# Altium PCB decoder.PcbDoc
Units mil, origin at the board's own origin, x right, y up, seen from the top; angles counter-clockwise.
Board outline 2362.2 x 2362.2 mil, 2 copper layers (Top Layer, Bottom Layer); 62 components, 42 nets, 192 pads, 35 vias.
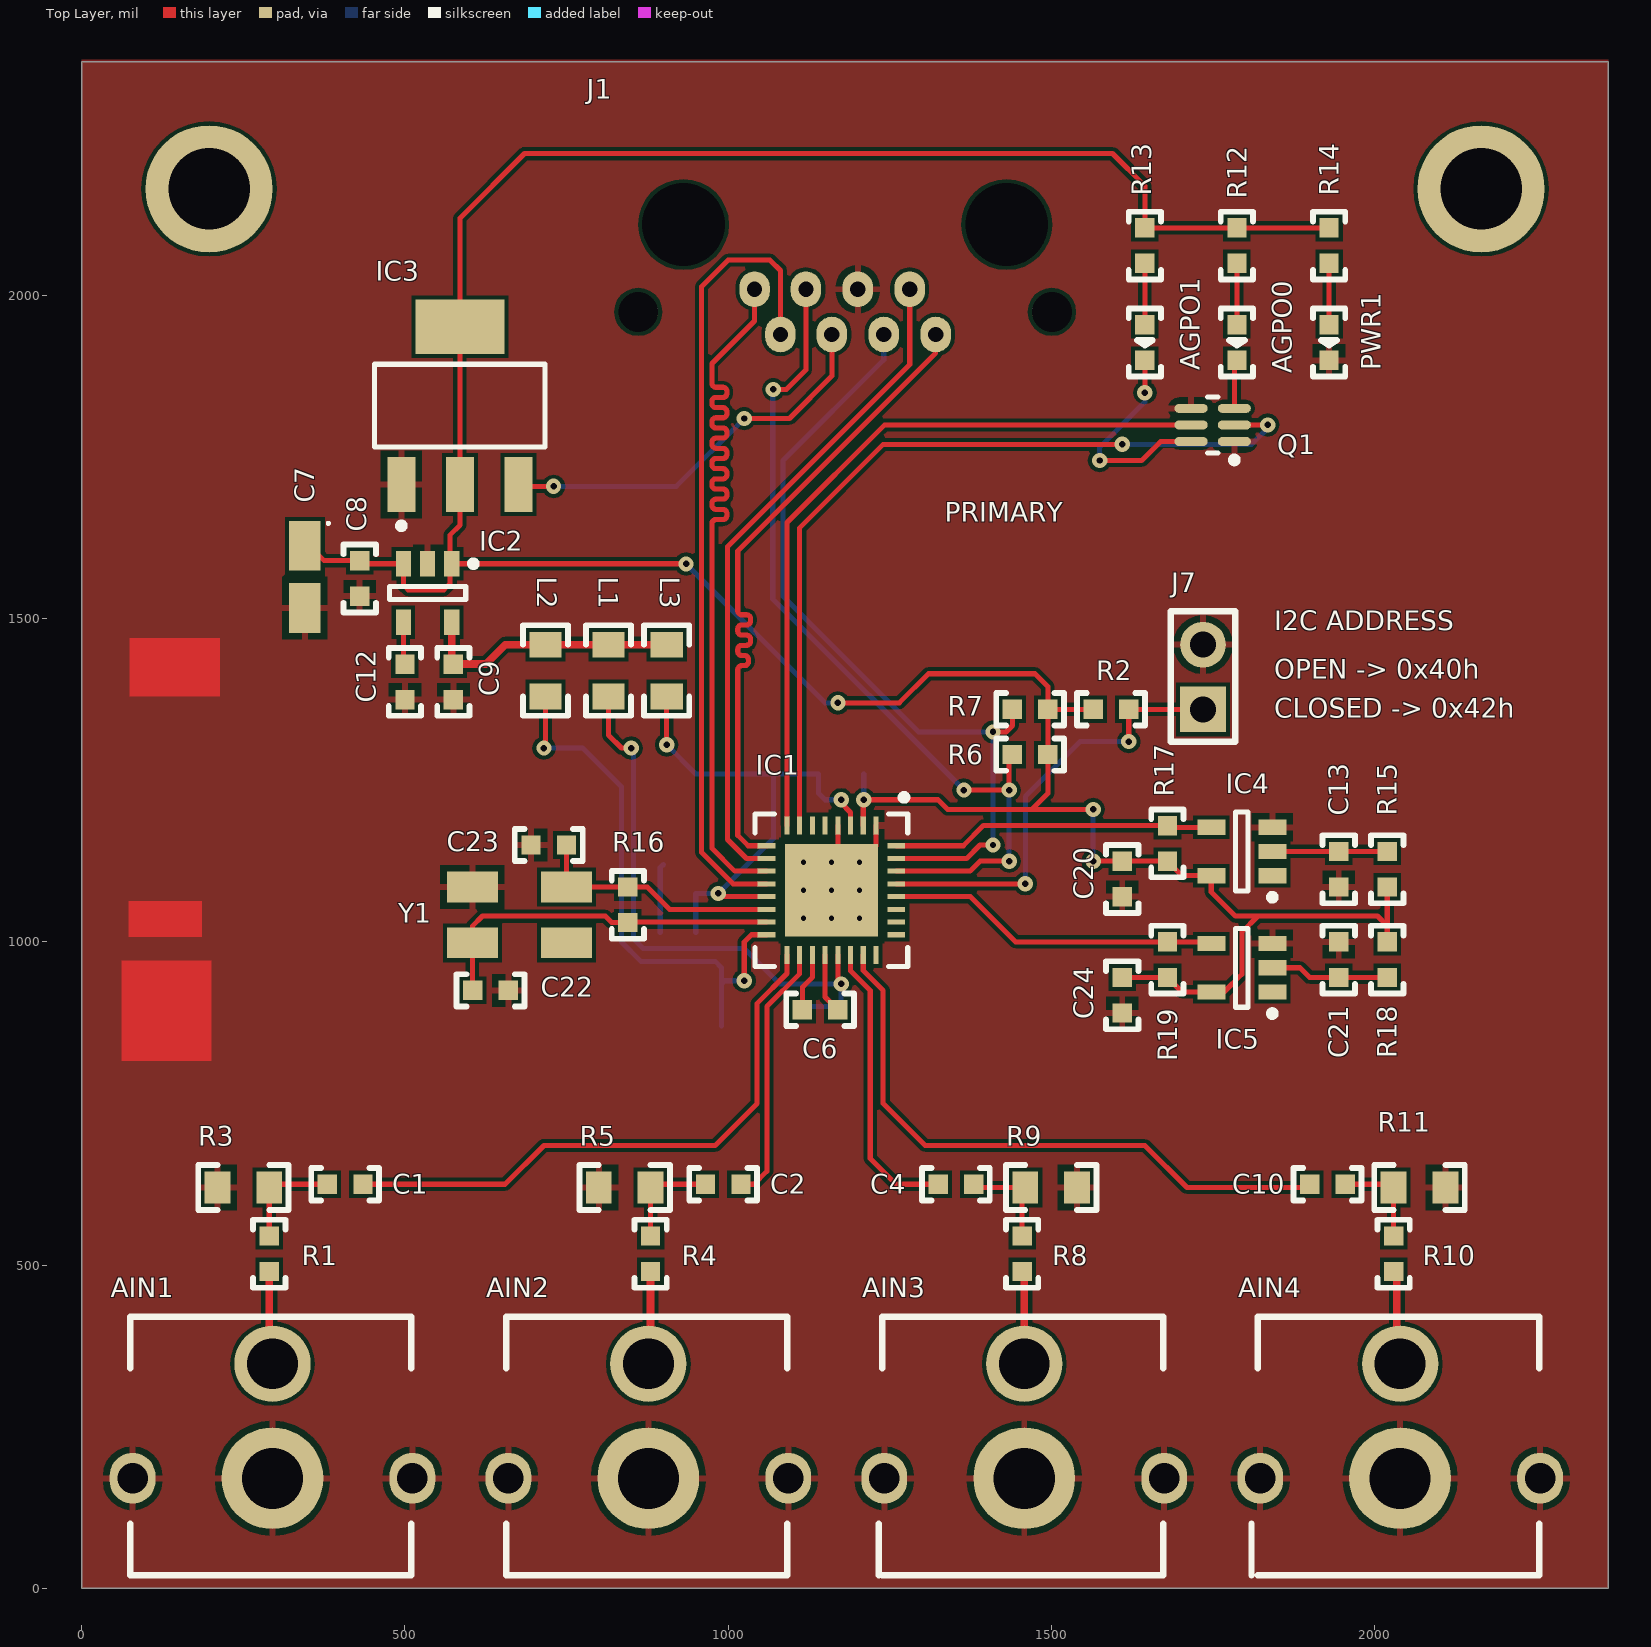
[diagram p0: Top Layer view]
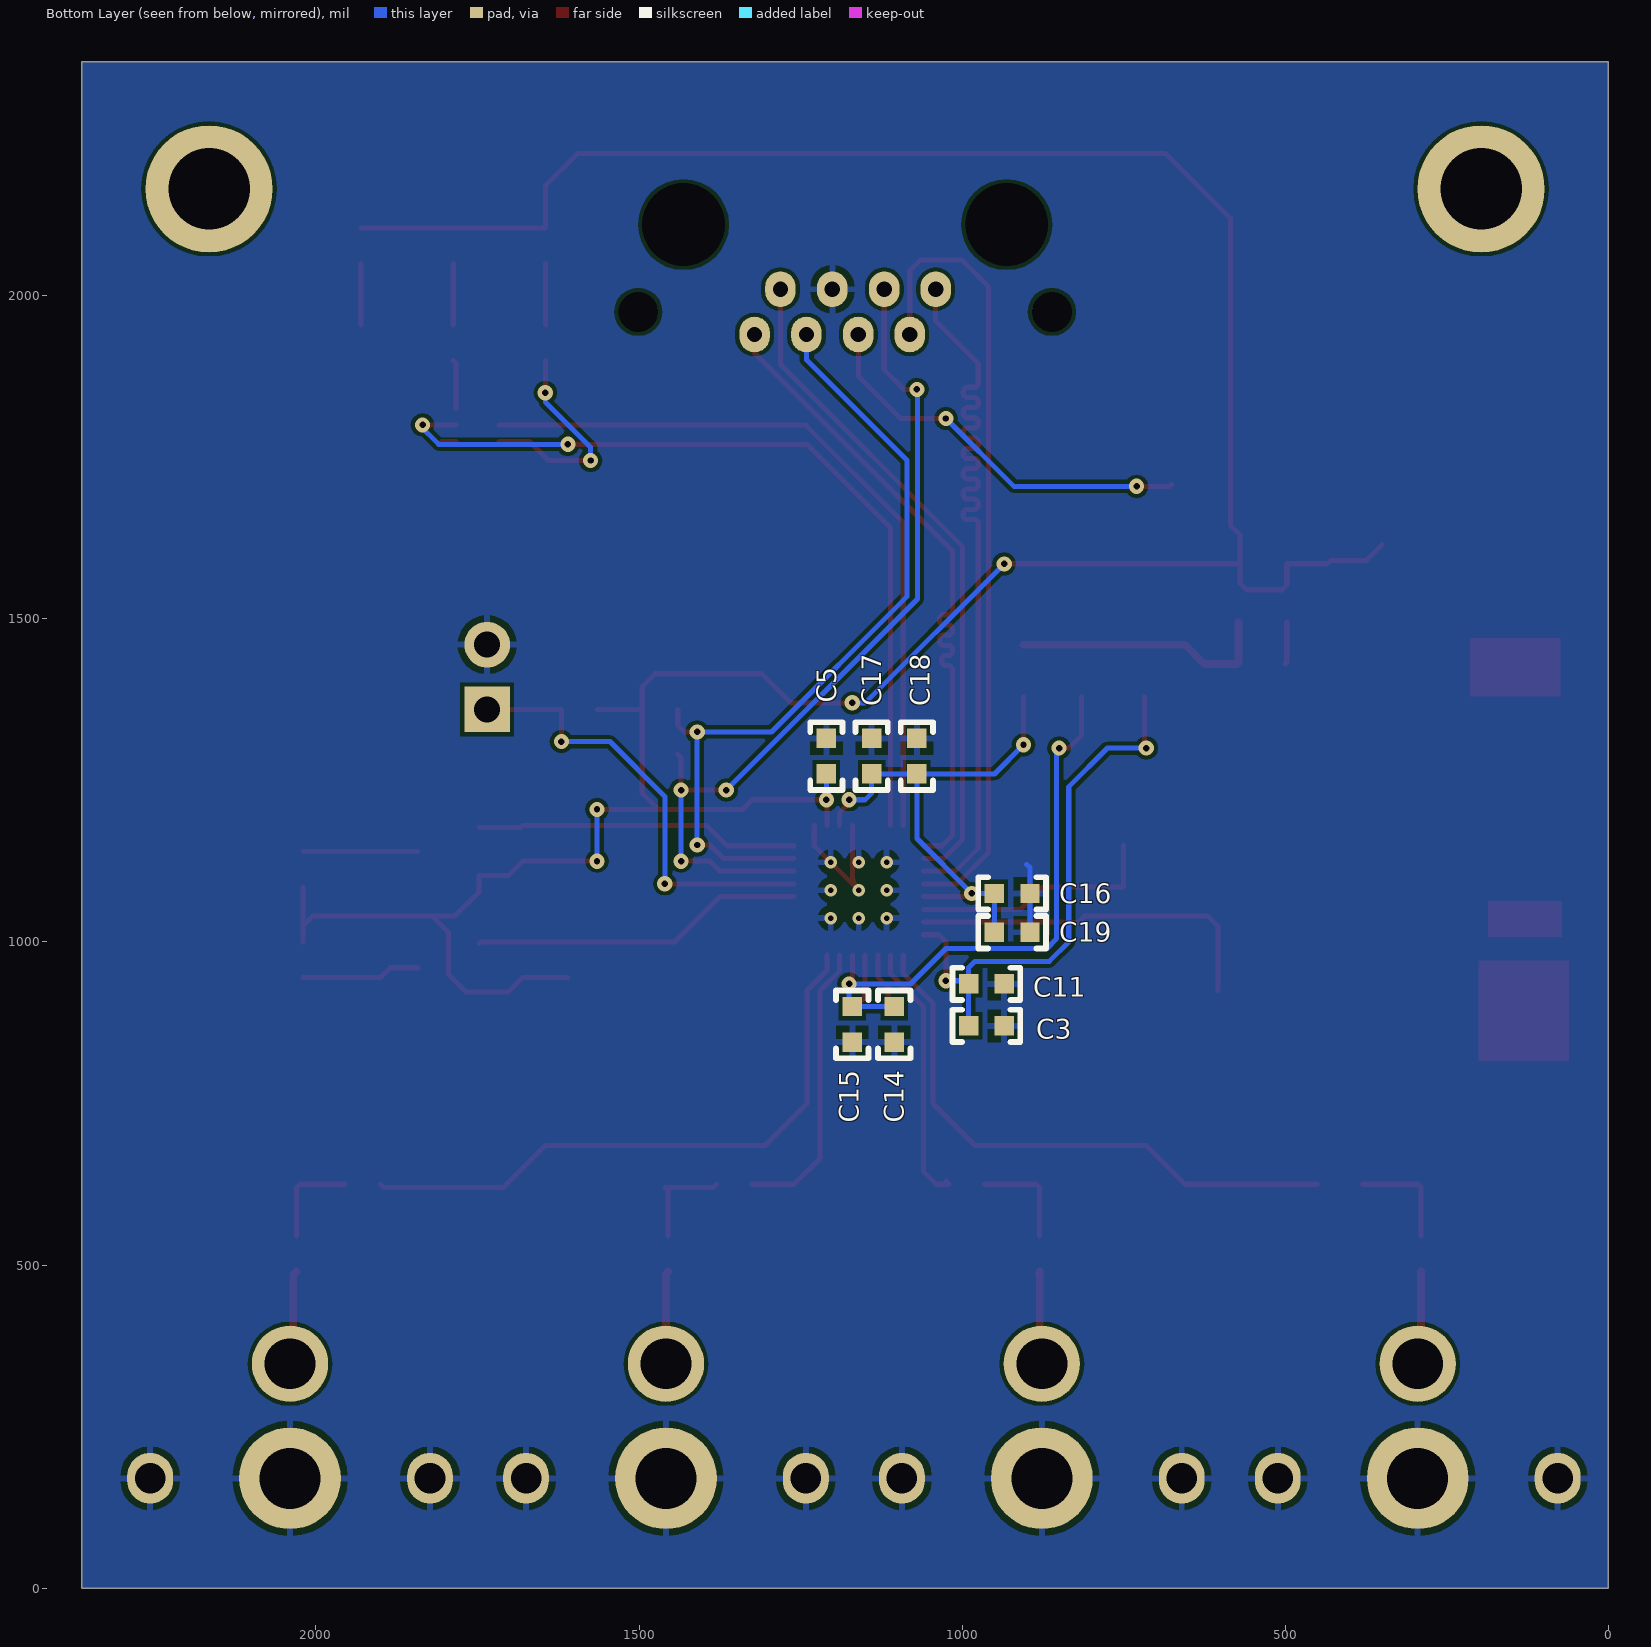
[diagram p1: Bottom Layer view, seen from below]
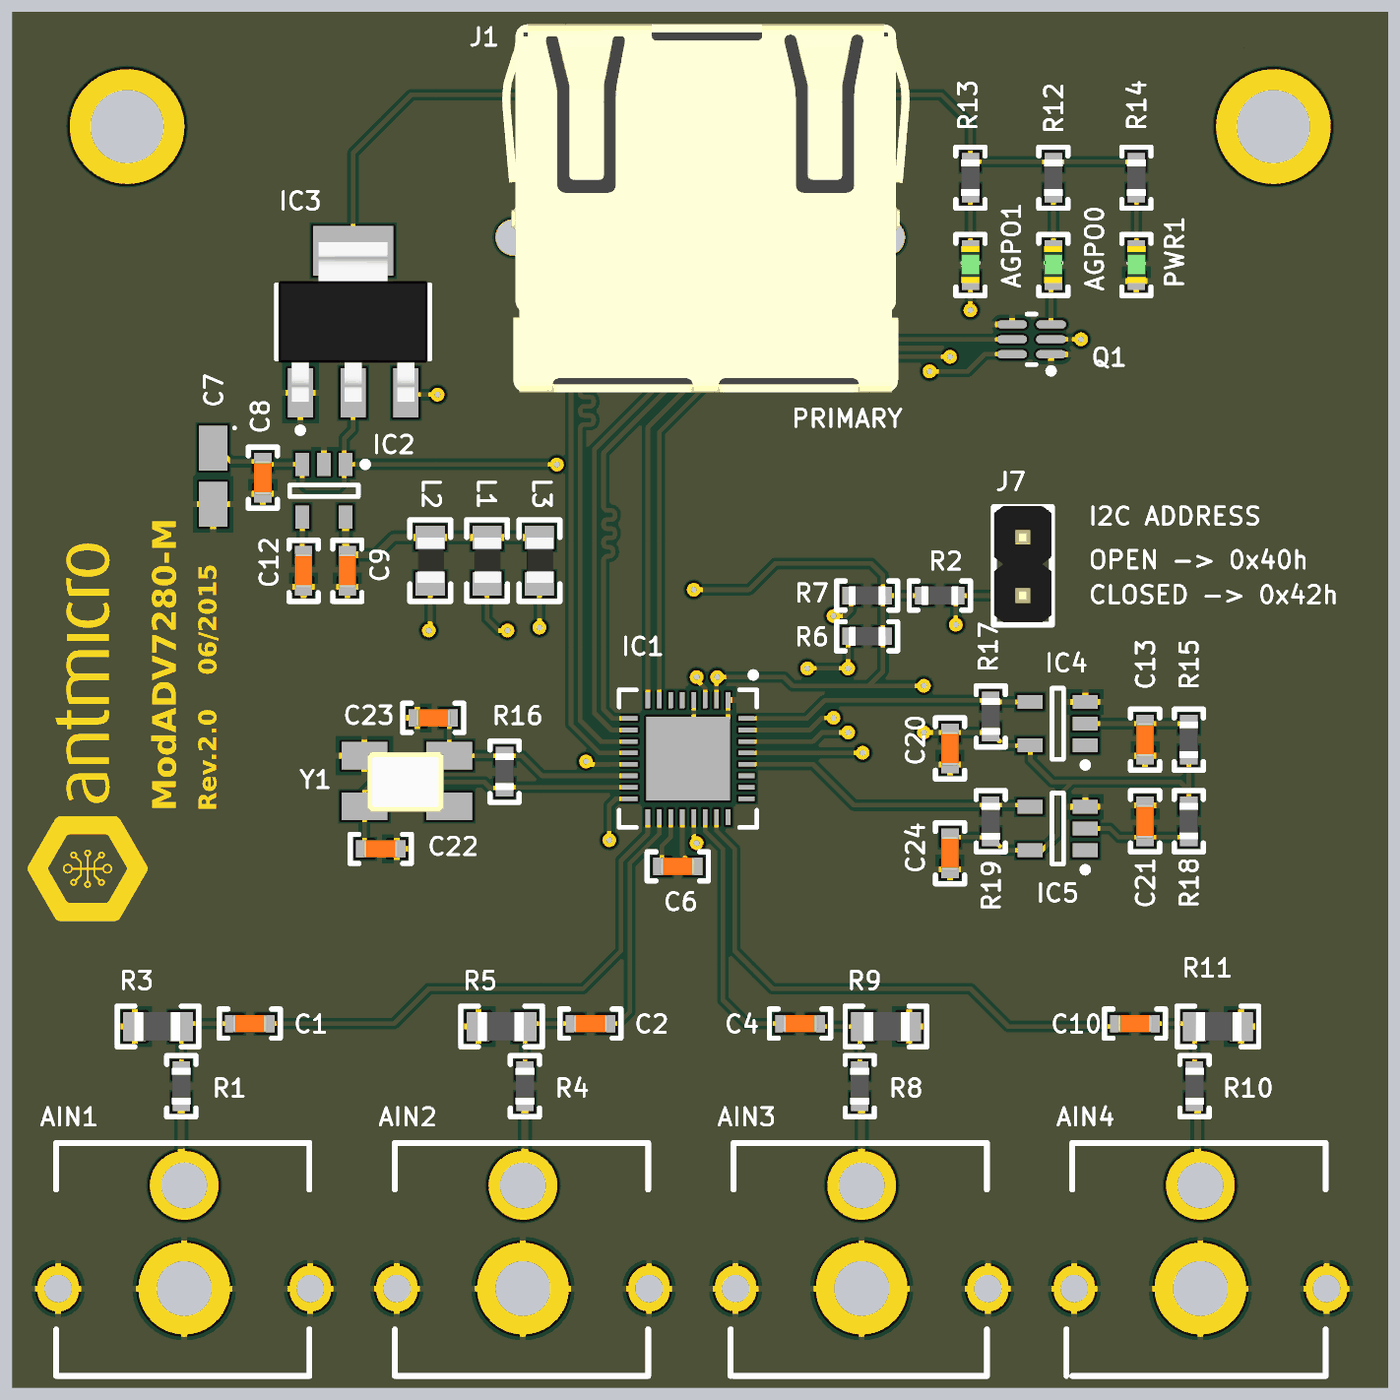
[diagram p2: 3D render of the assembled board from above, using the file's embedded part models]
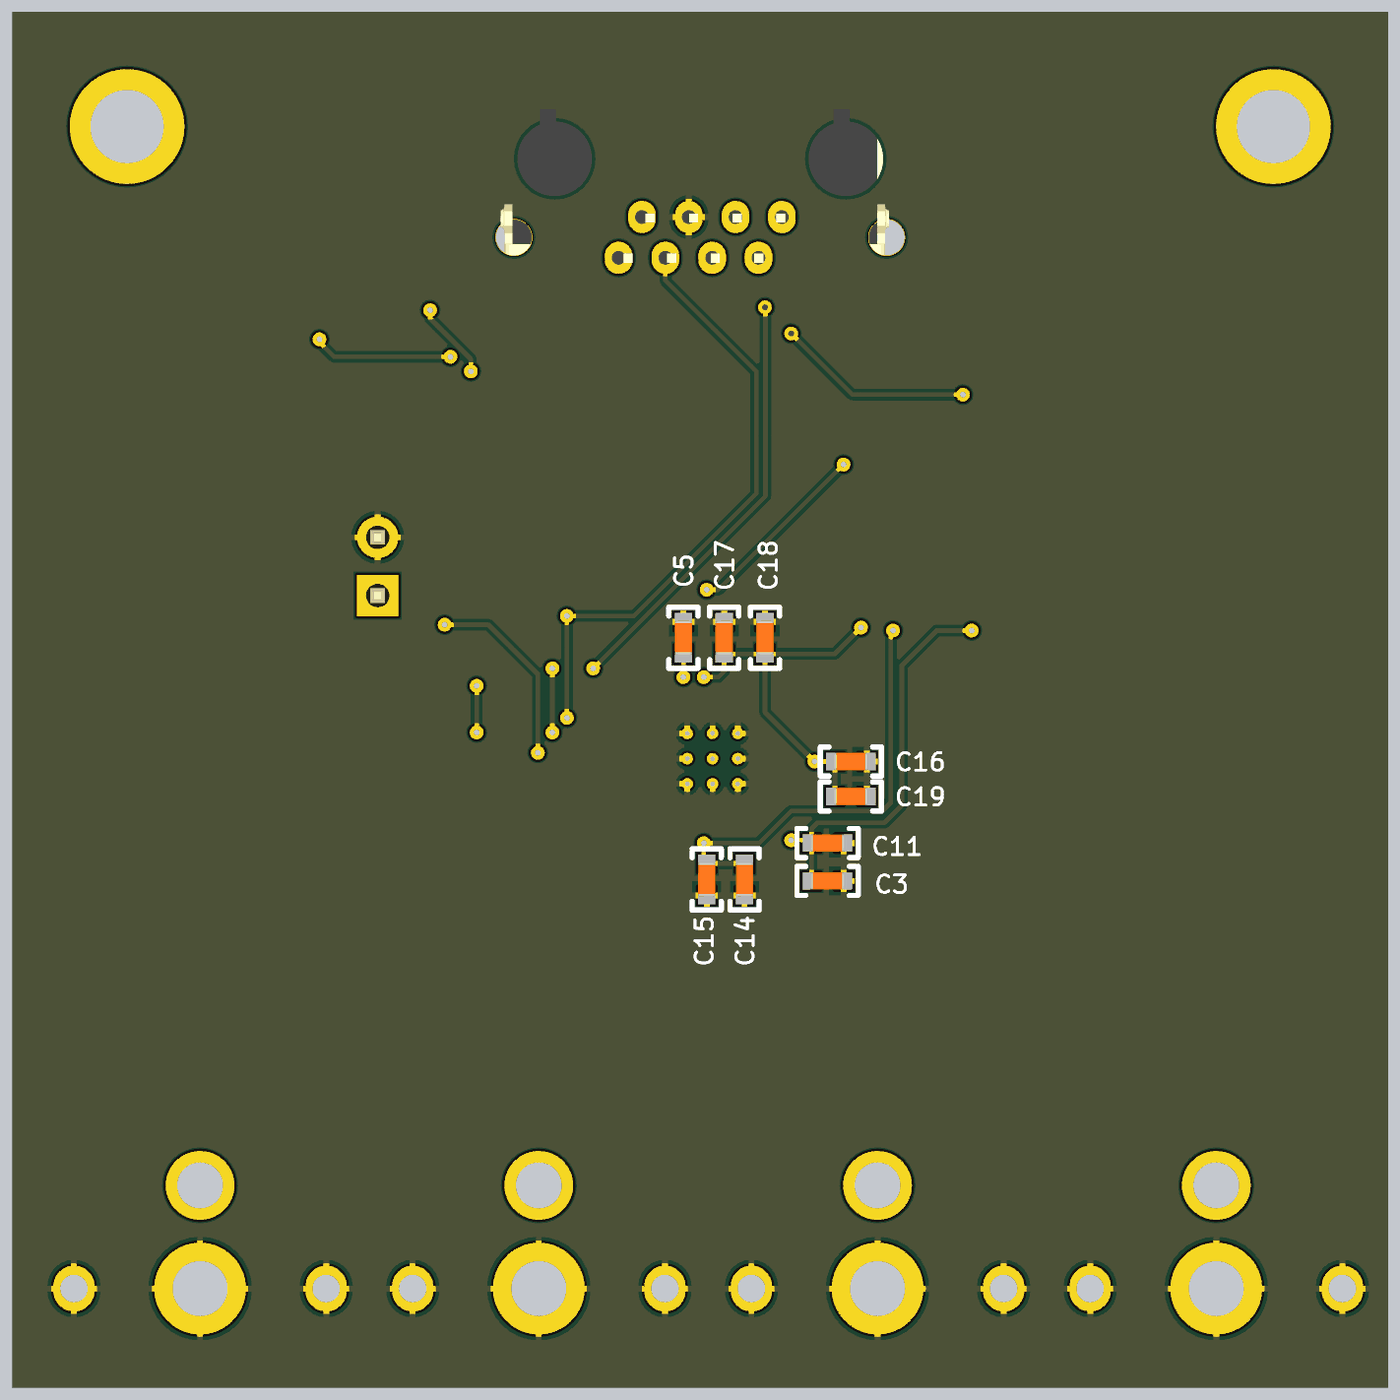
[diagram p3: 3D render of the assembled board from below, using the file's embedded part models]

## Layer stack, top to bottom
Top Solder: solder mask 0.4, Solder Resist, Dk 3.5
Top Layer: signal copper 1.4
Dielectric 1: dielectric 12.6, FR-4, Dk 4.8
Bottom Layer: signal copper 1.4
Bottom Solder: solder mask 0.4, Solder Resist, Dk 3.5

## Board outline
0,0 0,2362.2 2362.2,2362.2 2362.2,0

## Design rules (kind name [scope] priority, off if disabled: settings)
Clearance [All] p1: gap=5.91
DiffPairsRouting [All] p1: maxlimit=7.99 minlimit=7.99 mostfreqgap=7.99 toplayer_minwidth=5.91 toplayer_maxwidth=11.81 toplayer_prefwidth=7.87 bottomlayer_minwidth=5.91 bottomlayer_maxwidth=11.81 bottomlayer_prefwidth=7.87 maxuncoupledlength=500
HoleSize [All] p1: absolutevalues=TRUE maxlimit=150 minlimit=7.87 maxpercent=80.000 minpercent=20.000
MinimumAnnularRing [All] p1: minimumring=4.92
MinimumSolderMaskSliver [All] p1: minsoldermaskwidth=0
PlaneClearance [All] p1: clearance=10
PlaneConnect [All] p1: planeconnectstyle=Direct reliefexpansion=20 reliefentries=4 reliefconductorwidth=10 reliefairgap=10
PolygonConnect [All] p1: connectstyle=Relief reliefconductorwidth=10 reliefentries=4 polygonreliefangle="90 Angle" airgapwidth=10
RoutingVias [All] p1: holewidth=11.81 width=23.62 viastyle="Through Hole" minholewidth=9.84 minwidth=23.62 maxholewidth=15.75 maxwidth=23.62
SilkToSilkClearance [All] p1: silktosilkclearance=8
SilkToSolderMaskClearance [IsPad] p1: minsilkscreentomaskgap=3 clearancetoexposedcopper=TRUE
SolderMaskExpansion [All] p1: expansion=4
Width [All] p1: maxlimit=78.74 minlimit=5.91 preferedwidth=8
22 further rules are at their usual default settings.

## Classes and differential pairs
differential pair CSI_A_CLK: +CSI_A_CLK_P -CSI_A_CLK_N
differential pair CSI_A_D0: +CSI_A_D0_P -CSI_A_D0_N
differential pair XTAL: +XTAL_P -XTAL_N

## Components (designator, comment, footprint, x,y, rotation, side; value= is the part's Value field where it differs from the comment)
AGPO0 "*" LED0603 1787.5,1955 r270 top
AGPO1 "*" LED0603 1645,1955 r270 top
AIN1 "" CC-134B 295,170 r180 top
AIN2 "" CC-134B 876.67,170 r180 top
AIN3 "" CC-134B 1458.33,170 r180 top
AIN4 "" CC-134B 2040,170 r180 top
C1 "100n" 0603 380,625 r0 top
C2 "100n" 0603 965,625 r0 top
C3 "100n" 0603 935,870 r0 bottom
C4 "100n" 0603 1380,625 r180 top
C5 "100n" 0603 1210,1315 r270 bottom
C6 "100n" 0603 1170,895 r180 top
C7 "" KEMET_A 345,1565 r270 top
C8 "10u" 0603 430,1535 r90 top
C9 "10u" 0603 575,1375 r90 top
C10 "100n" 0603 1955,625 r180 top
C11 "10n" 0603 935,935 r0 bottom
C12 "10n" 0603 500,1375 r90 top
C13 "100n" 0603 1945,1085 r90 top
C14 "100n" 0603 1105,845 r90 bottom
C15 "10n" 0603 1170,845 r90 bottom
C16 "100n" 0603 895,1075 r0 bottom
C17 "100n" 0603 1140,1315 r270 bottom
C18 "10n" 0603 1070,1315 r270 bottom
C19 "10n" 0603 895,1015 r0 bottom
C20 "100n" 0603 1610,1070 r90 top
C21 "100n" 0603 1945,1000 r270 top
C22 "27p" 0603 660,925 r180 top
C23 "27p" 0603 695,1150 r0 top
C24 "100n" 0603 1610,890 r90 top
IC1 "ADV7280BCPZ-M" LFCSP-32 1160,1080 r270 top
IC2 "LP2992AIM5-1.8/NOPB" SOT23-5N 535,1540 r270 top
IC3 "*" SOT223 585,1830 r0 top
IC4 "SN74LVC1G17" SOT23127P600-8N 1795,1140 r180 top
IC5 "SN74LVC1G17" SOT23127P600-8N 1795,960 r180 top
J1 "" "RJ45 AMP-1-406541" 1321.26,1940 r180 top locked
J7 "*" "HEADER_1X2_male 2.54mm" 1735,1360 r90 top
L1 "*" 0805 815,1460 r270 top
L2 "*" 0805 717.5,1460 r270 top
L3 "*" 0805 905,1460 r270 top
PWR1 "*" LED0603 1930,1955 r270 top
Q1 "PMGD130UN" TSOP65P210X110-6N 1750,1800 r180 top
R1 "24R" 0603 290,490 r90 top
R2 "1k" 0603 1565,1360 r0 top
R3 "51R" 0805 210,620 r0 top
R4 "24R" 0603 880,490 r90 top
R5 "51R" 0805 800,620 r0 top
R6 "4k7" 0603 1440,1290 r0 top
R7 "4k7" 0603 1440,1360 r0 top
R8 "24R" 0603 1455,490 r90 top
R9 "51R" 0805 1540,620 r180 top
R10 "24R" 0603 2030,490 r90 top
R11 "51R" 0805 2110,620 r180 top
R12 "330R" 0603 1787.5,2050 r90 top
R13 "330R" 0603 1645,2050 r90 top
R14 "330R" 0603 1930,2050 r90 top
R15 "22k" 0603 2020,1140 r270 top
R16 "1M" 0603 845,1030 r90 top
R17 "100k" 0603 1680,1180 r270 top
R18 "100k" 0603 2020,945 r90 top
R19 "100k" 0603 1680,1000 r270 top
Y1 "28.63636MHz" TXC_7B 750,1085 r180 top

## Footprints (in the part's own frame and the unit in brackets; to place one, negate y for a bottom-side part, rotate by r counter-clockwise, add the part's x,y. Pads: shape width x height; smd on the part's side, far side on the other; paste and mask are expansions set on the pad)
0603 [mil]
  rect 30x30 smd: 1(0,0) 2(55,0)
  silkscreen extent -25,-25 80,25, body extent -2,-15 58,15, height 31
0805 [mil]
  rect 40x50 smd: 1(0,0) 2(80,0)
  silkscreen extent -30,-35 110,35, body extent 0,-23 79,25, height 37
CC-134B [mm]
  round 4 hole 2.4: GND(0,0)
  oval 1.8x2 hole 1.2: SHIELD(-5.5,0) SHIELD(5.5,0)
  round 3 hole 2: SIGNAL(0,-4.5)
  silkscreen extent -5.46,-6.35 5.59,3.81
"HEADER_1X2_male 2.54mm" [mm] "Pinhead male 1x2 pitch 2.54mm straight"
  rect 1.8x1.8 hole 1.02: 1(0,0)
  round 1.8 hole 1.02: 2(2.54,0)
  silkscreen extent -1.27,-1.27 3.86,1.27, body extent -1.17,-1.25 3.91,1.25, height 8.33
KEMET_A [mm] "Kemet A size package"
  rect 1.95x1.25 smd: 1(-1.225,0) 2(1.225,0)
  silkscreen extent -2.15,0.88 -2.05,0.97, body extent -1.67,-0.89 1.73,0.91, height 1.8
LED0603 [mil]
  rect 30x30 smd: A(0,0) K(55,0)
  silkscreen extent -25,-25 80,25, body extent -5,-16 58,16, height 43
LFCSP-32 [mm] "Close enough model"
  rect 0.7x0.2 smd: 1(-2.55,1.75) 2(-2.55,1.25) 3(-2.55,0.75) 4(-2.55,0.25) 5(-2.55,-0.25) 6(-2.55,-0.75) 7(-2.55,-1.25) 8(-2.55,-1.75) 17(2.55,-1.75) 18(2.55,-1.25) 19(2.55,-0.75) 20(2.55,-0.25) 21(2.55,0.25) 22(2.55,0.75) 23(2.55,1.25) 24(2.55,1.75)
  rect 0.2x0.7 smd: 9(-1.75,-2.55) 10(-1.25,-2.55) 11(-0.75,-2.55) 12(-0.25,-2.55) 13(0.25,-2.55) 14(0.75,-2.55) 15(1.25,-2.55) 16(1.75,-2.55) 25(1.75,2.55) 26(1.25,2.55) 27(0.75,2.55) 28(0.25,2.55) 29(-0.25,2.55) 30(-0.75,2.55) 31(-1.25,2.55) 32(-1.75,2.55)
  rect 3.65x3.65 smd: 33(0,0)
  silkscreen extent -3.77,-3 3,3, body extent -2.55,-2.55 2.55,2.55, height 0.8
"RJ45 AMP-1-406541" [mm] "TE CONNECTIVITY / AMP - 1-406541-1 - JACK, THT, R/A, RJ45, 8P8C"
  oval 1.2x1.4 hole 0.6: 1(7.12,-1.778) 2(6.1,0) 3(5.1,-1.78) 4(4.08,0) 5(3.06,-1.778) 6(2.04,0) 7(1.02,-1.78) 8(0,0)
  round 1.524 hole 1.57: s1(-4.57,-0.89) s2(11.69,-0.89)
  round 1.524 hole 3.25 unplated: x1(-2.79,-4.32) x2(9.91,-4.32)
  body extent -5.57,-10.19 12.2,5.86, height 14.53
SOT23-5N [mm] "SOT23, 5-Leads, Body 2,90x2,70mm, Pitch 0,95mm, IPC Medium Density"
  rect 1x0.6 smd: 1(-1.15,0.95) 2(-1.15,0) 3(-1.15,-0.95) 4(1.15,-0.95) 6(1.15,0.95)
  silkscreen extent -1.27,-1.5 0.25,1.93, body extent -0.85,-1.5 0.85,1.5, height 1.45
SOT223 [mm] "SOT-223/SC-73; 4 Leads; Body 6.7 x 7.3 mm, inc. leads (LxW max)"
  rect 1.1x2.15 smd: 1(-2.3,-3.1) 2(0,-3.1) 3(2.3,-3.1)
  rect 3.5x2.15 smd: 4(0,3.1)
  silkscreen extent -3.35,-4.85 3.35,1.63, body extent -3.25,-3.48 3.25,3.48, height 1.61
SOT23127P600-8N [mm]
  rect 1.1x0.6 smd: 1(-1.2,0.95) 2(-1.2,0) 3(-1.2,-0.95) 4(1.2,-0.95) 5(1.2,0.95)
  silkscreen extent -1.33,-1.55 0.25,1.92, body extent -0.87,-1.52 0.87,1.53, height 1.45
TSOP65P210X110-6N [mm] "TSOP, 6-Leads, Body 2,00x1,25mm, Pitch 0,65mm, IPC Medium Density"
  oval 1.3x0.35 smd: 1(-0.85,0.65) 2(-0.85,0) 3(-0.85,-0.65) 4(0.85,-0.65) 5(0.85,0) 6(0.85,0.65)
  silkscreen extent -0.98,-1.1 0.2,1.5, body extent -0.7,-1.1 0.7,1.1, height 1.1
TXC_7B [mm] "TXC 7B series oscillator"
  rect 2x1.2 smd: 1(0,0) 2(3.7,0) 3(3.7,2.2) 4(0,2.2)
  body extent 0.26,-0.16 3.56,2.44, height 0.8

## Part data
AGPO0 AGPO1 PWR1: library part LED_G, "LED Green 0603 case"
AIN1 AIN2 AIN3 AIN4: library part CC-134B, "Shielded RCA socket"
C1 C2 C3 C4 C5 C6 C10 C13 C14 C16 C17 C20 C21 C24: library part C_100n_0603, "MLCC SMT Capacitor 100nF 0603"
C7: library part C_100u_KEMET_A, "Tantalum SMT Capacitor 100uF Case KEMET_A"
C8 C9: library part C_10u_0603, "MLCC SMT Capacitor 10uF 0603"
C11 C12 C15 C18 C19: library part C_10n_0603, "MLCC SMT Capacitor 10nF 0603"
C22 C23: library part C_27p_0603, "MLCC SMT Capacitor 27pF 0603"
IC1: "MIPI 10Bit 4x Oversampled SDTV Video Decoder with Deinterlacer"
IC2: library part LP2992AIM5-1.8, "LDO 1.8V 250mA"
IC3: library part AP1117E33G-13, "IC, LDO, REG, 3.3V, SOT223"
IC4 IC5: "Single Schmitt trigger buffer"
J1: library part "RJ45 AMP-1-406541", "MODULAR, JACK, THT, R/A, RJ45, 8P8C"
J7: library part HEADER_1X2_male, "1x2 pinhead male"
L1 L2 L3: library part 742792022, "WURTH ELEKTRONIK - 742792022 - FERRITE BEAD, 0.05OHM, 2A, 0805"
Q1: "20 V, dual N-channel Trench MOSFET"
R1 R4 R8 R10: library part R_24R_0603, "SMT Resistor 24R 0603"
R2: library part R_1k_0603, "SMT Resistor 1k 0603"
R3 R5 R9 R11: library part R_51R_0805, "SMT Resistor 51R 0805"
R6 R7: library part R_4k7_0603, "SMT Resistor 4k7 0603"
R12 R13 R14: library part R_330R_0603, "SMT Resistor 330R 0603"
R15: library part R_22k_0603, "SMT Resistor 22k 0603"
R16: library part R_1M_0603, "SMT Resistor 1M 0603"
R17 R18 R19: library part R_100k_0603, "SMT Resistor 100k 0603"
Y1: library part 7B-28.63636MAAJ-T, "TXC  7B-28.63636MAAJ-T  XTAL, 28.63636MHZ, 18PF, SMD, 5X3.2"

## Free pads (board coordinates)
  round 196.85 hole 125.98 unplated: X(196.85,2165.35) X(2165.35,2165.35)

## Via types
v1: diameter 23.62, hole 10, Top Layer to Bottom Layer, 26 vias
v2: diameter 19.68, hole 7.87, Top Layer to Bottom Layer, 9 vias

## Nets (pads, with @x,y where several pads share a name; then routed paths per layer and width w, separated by ;. In a path a pad name is that pad's centre, name@x,y a point inside that pad or via, vN(x,y) a via of type N, cw(c..) or ccw(c..) an arc to the next point about the centre after c; other vN are vias at no path point)
1.8V: C9.2 IC2.6 L1.1 L2.1 L3.1 | length 408.2
  Top Layer w11.81: IC2.6 572.4,1432.6 C9.2 625,1430 655,1460 L2.1 L1.1 L3.1
3.3V: C5.2 C7.1 C8.2 C20.2 C24.2 IC1.2 IC2.1 IC2.3 IC3.2 IC3.4 IC4.5 IC5.5 R2.1 R6.2 R7.2 R12.2 R13.2 R14.2 R15.2 R17.2 R18.2 R19.2 | length 5048.2
  Top Layer w7.87: C7.1@350,1615 375,1590 C8.2 434.72,1585.28 IC2.3 497.6,1552.4 505,1545 560,1545 570,1555 570,1630 585,1645 IC3.2 IC3.4 585,2120 685,2220 1595,2220 1645,2170 R13.2 R12.2 R14.2 ; IC2.1 934.72,1585.28 v1(935,1585) ; v1(1170,1370) 1265,1370 1310,1415 1475,1415 1495,1395 R7.2 ; IC1.2 1209.21,1219.21 v1(1210,1220) 1325,1220 1340,1205 1470,1205 ; v1(1565,1125) C20.2 R17.2 1702.4,1102.6 IC4.5 1747.76,1077.24 1785,1040 1820,1040 ; v1(1565,1205) 1470,1205 ; R2.1 R7.2 ; C24.2 R19.2 1702.4,922.6 IC5.5 1767.6,922.6 1795,950 1795,1015 1820,1040 ; R18.2 2020,1025 ; R15.2 2020,1025 ; 1470,1205 1495,1230 R6.2 R7.2 ; 1820,1040 2005,1040 2020,1025
  Bottom Layer w7.87: v1(935,1585) 1150,1370 v1(1170,1370) ; v1(1210,1220) C5.2 ; v1(1565,1125) v1(1565,1205)
+5V_SYS: IC3.3 J1.4 | length 621.3
  Top Layer w7.87: IC3.3 678.5,1705 v1(730,1705) ; v1(1025,1810) 1095,1810 1160.63,1875.63 J1.4
  Bottom Layer w7.87: v1(730,1705) 920,1705 v1(1025,1810)
AGPO0: IC1.8 Q1.5 | length 1156.6
  Top Layer w7.87: IC1.8 1091.1,1648.94 1241.85,1799.68 1716.22,1799.68 Q1.5
AGPO1: IC1.7 Q1.2 | length 1312.1
  Top Layer w7.87: IC1.7 1110.79,1640.79 1240,1770 v1(1610,1770) ; Q1.2 v1(1835,1800)
  Bottom Layer w7.87: v1(1610,1770) 1810,1770 1840,1800 v1(1835,1800)
AIN1: C1.2 IC1.17 | length 895.5
  Top Layer w7.87: 450,625 655,625 715,685 980,685 1045,750 1045,905 1091.1,951.1 IC1.17
AIN2: C2.2 IC1.18 | length 411
  Top Layer w7.87: C2.2@1025,630 C2.2 1040,625 1060,645 1060,900 1110.79,950.79 IC1.18
AIN3: C4.2 IC1.22 | length 448.8
  Top Layer w7.87: IC1.22 1189.53,955.47 1220,925 1220,665 1260,625 C4.2
AIN4: C10.2 IC1.23 | length 958.3
  Top Layer w7.87: IC1.23 1209.21,955.79 1240,925 1240,750 1305,685 1645,685 1710,620 1895,620 C10.2
AVDD: C14.2 C15.2 IC1.21 L1.2 | length 908.9
  Top Layer w7.87: L1.2 815,1320 835,1300 v1(850,1300) ; IC1.21 1169.84,940.16 1170,940 1180,940 v1(1175,935)
  Bottom Layer w7.87: v1(850,1300) 853.78,1296.22 853.78,1005 868.78,990 1025,990 1080,935 v1(1175,935) 1175,905 C15.2 C14.2
CSI_A_CLK_N: IC1.12 J1.2 | length 1240.8
  Top Layer w7.87: IC1.12 1007.72,1089.84 959.13,1138.43 959.13,2014.13 1000,2055 1065,2055 1081.1,2038.9 J1.2
CSI_A_CLK_P: IC1.11 J1.1 | length 1240.8
  Top Layer w7.87: J1.1 1040.94,1960.94 975,1895 975,1864.65 ccw(c981.3,1864.65) 981.3,1858.35 991.9,1858.35 cw(c991.9,1852.05) 998.2,1852.05 998.2,1848.9 cw(c991.9,1848.9) 991.9,1842.6 981.3,1842.6 ccw(c981.3,1836.3) 975,1836.3 975,1833.15 ccw(c981.3,1833.15) 981.3,1826.85 991.9,1826.85 cw(c991.9,1820.55) 998.2,1820.55 998.2,1817.4 cw(c991.9,1817.4) 991.9,1811.1 981.3,1811.1 ccw(c981.3,1804.8) 975,1804.8 975,1801.65 ccw(c981.3,1801.65) 981.3,1795.35 991.9,1795.35 cw(c991.9,1789.05) 998.2,1789.05 998.2,1785.91 cw(c991.9,1785.91) 991.9,1779.61 981.3,1779.61 ccw(c981.3,1773.31) 975,1773.31 975,1770.16 ccw(c981.3,1770.16) 981.3,1763.86 991.9,1763.86 cw(c991.9,1757.56) 998.2,1757.56 998.2,1754.41 cw(c991.9,1754.41) 991.9,1748.11 981.3,1748.11 ccw(c981.3,1741.81) 975,1741.81 975,1738.66 ccw(c981.3,1738.66) 981.3,1732.36 991.9,1732.36 cw(c991.9,1726.06) 998.2,1726.06 998.2,1722.91 cw(c991.9,1722.91) 991.9,1716.61 981.3,1716.61 ccw(c981.3,1710.31) 975,1710.31 975,1707.17 ccw(c981.3,1707.17) 981.3,1700.87 991.9,1700.87 cw(c991.9,1694.57) 998.2,1694.57 998.2,1691.42 cw(c991.9,1691.42) 991.9,1685.12 981.3,1685.12 ccw(c981.3,1678.82) 975,1678.82 975,1675.67 ccw(c981.3,1675.67) 981.3,1669.37 991.9,1669.37 cw(c991.9,1663.07) 998.2,1663.07 998.2,1659.92 cw(c991.9,1659.92) 991.9,1653.62 981.3,1653.62 ccw(c981.3,1647.32) 975,1647.32 975,1637.87 975,1630 975,1145 1010.47,1109.53 IC1.11
CSI_A_D0_N: IC1.10 J1.7 | length 1041
  Top Layer w7.87: IC1.10 1028.35,1129.21 999.13,1158.43 999.13,1611.57 1281.1,1893.54 J1.7
CSI_A_D0_P: IC1.9 J1.8 | length 1041
  Top Layer w7.87: 1015,1396.02 1015,1403.9 ; IC1.9 1031.1,1148.9 1015,1165 1015,1403.9 ; J1.8 1321.26,1911.26 1015,1605 1015,1595 1015,1512.56 ccw(c1021.3,1512.56) 1021.3,1506.26 1028.52,1506.26 cw(c1028.52,1499.96) 1034.82,1499.96 1034.82,1496.81 cw(c1028.52,1496.81) 1028.52,1490.51 1021.3,1490.51 ccw(c1021.3,1484.21) 1015,1484.21 1015,1481.06 ccw(c1021.3,1481.06) 1021.3,1474.76 1028.52,1474.76 cw(c1028.52,1468.46) 1034.82,1468.46 1034.82,1465.31 cw(c1028.52,1465.31) 1028.52,1459.02 1021.3,1459.02 ccw(c1021.3,1452.72) 1015,1452.72 1015,1449.57 ccw(c1021.3,1449.57) 1021.3,1443.27 1025.29,1443.27 cw(c1025.29,1436.97) 1031.59,1436.97 1031.59,1433.82 cw(c1025.29,1433.82) 1025.29,1427.52 1021.3,1427.52 ccw(c1021.3,1421.22) 1015,1421.22 1015,1411.77 1015,1403.9
DVDD: C16.2 C17.2 C18.2 C19.2 IC1.3 IC1.13 L3.2 | length 835.4
  Top Layer w7.87: v1(905,1305) L3.2 ; v1(985,1075) 990,1070 1025,1070 1025.16,1070.16 IC1.13 ; v1(1175,1220) 1175,1215 1189.53,1200.47 IC1.3
  Bottom Layer w7.87: v1(905,1305) 950,1260 C18.2 ; C19.2 C16.2 v1(985,1075) 1070,1160 C18.2 ; v1(1175,1220) 1150,1220 1140,1230 C17.2 C18.2
GND: AIN1.GND AIN1.SHIELD AIN2.GND AIN2.SHIELD AIN3.GND AIN3.SHIELD AIN4.GND AIN4.SHIELD C3.1 C5.1 C7.2 C8.1 C9.1 C11.1 C12.1 C13.1 C14.1 C15.1 C16.1 C17.1 C18.1 C19.1 C20.1 C21.1 C22.1 C23.1 C24.1 IC1.1 IC1.4 IC1.33 IC2.2 IC3.1 IC4.3 IC5.3 J1.5 J7.2 PWR1.K Q1.1 Q1.4 R3.1 R5.1 R9.1 R11.1 Y1.2 | length 361.2
  Top Layer w7.87: IC1.4 1169.84,1103.76 cw(c1136.24,1103.76) v2(1160,1080) v2(1203.31,1123.31) 1228.9,1148.9 IC1.1 ; Q1.1 Q1.1@1805.59,1774.41
  Bottom Layer w7.87: C19.1 C16.1 895,1115 900,1120
  other v2: 1116.69,1036.69 1160,1036.69 1203.31,1036.69 1116.69,1080 1203.31,1080 1116.69,1123.31 1160,1123.31
NetAGPO0_A: AGPO0.A R12.1 | length 95
  Top Layer w7.87: AGPO0.A R12.1
NetAGPO0_K: AGPO0.K Q1.3 | length 76.1
  Top Layer w7.87: Q1.3 1783.46,1895.96 AGPO0.K
NetAGPO1_A: AGPO1.A R13.1 | length 95
  Top Layer w7.87: AGPO1.A R13.1
NetAGPO1_K: AGPO1.K Q1.6 | length 337.7
  Top Layer w7.87: v1(1575,1745) 1640,1745 1669.41,1774.41 Q1.6 ; v1(1645,1850) AGPO1.K
  Bottom Layer w7.87: v1(1575,1745) 1575,1765.62 1645,1835.62 v1(1645,1850)
NetAIN1_SIGNAL: AIN1.SIGNAL R1.1 | length 137.8
  Top Layer w11.81: AIN1.SIGNAL@290,352.17 R1.1
NetAIN2_SIGNAL: AIN2.SIGNAL R4.1 | length 138.5
  Top Layer w11.81: AIN2.SIGNAL@880,353.83 R4.1 R4.1@881.67,488.33
NetAIN3_SIGNAL: AIN3.SIGNAL R8.1 | length 139.2
  Top Layer w11.81: R8.1 1458.33,486.67 AIN3.SIGNAL@1458.33,352.17
NetAIN4_SIGNAL: AIN4.SIGNAL R10.1 | length 139.9
  Top Layer w11.81: R10.1 2035,485 AIN4.SIGNAL@2035,352.17
NetC1_1: C1.1 R1.2 R3.2 | length 167.1
  Top Layer w7.87: R1.2 R3.2 295,625 C1.1
NetC2_1: C2.1 R4.2 R5.2 | length 162.1
  Top Layer w7.87: R4.2 R5.2 885,625 C2.1
NetC4_1: C4.1 R8.2 R9.2 | length 159.1
  Top Layer w7.87: C4.1 1385,620 R9.2 1455,615 R8.2
NetC6_1: C6.1 IC1.20 | length 92.8
  Top Layer w7.87: IC1.20 1150.16,914.84 C6.1
NetC6_2: C6.2 IC1.19 | length 91
  Top Layer w7.87: C6.2 1115,930 1130.47,945.47 IC1.19
NetC10_1: C10.1 R10.2 R11.2 | length 152.1
  Top Layer w7.87: C10.1 2025,625 R11.2 R10.2
NetC12_2: C12.2 IC2.4 | length 65.7
  Top Layer w7.87: IC2.4 497.6,1432.4 C12.2
NetC13_2: C13.2 IC4.2 R15.1 | length 177.8
  Top Layer w7.87: IC4.2 C13.2 R15.1
NetIC1_29: IC1.29 J7.1 R2.2 | length 694.9
  Top Layer w7.87: IC1.29 1459.84,1089.84 v1(1460,1090) ; v1(1620,1310) R2.2 J7.1
  Bottom Layer w7.87: v1(1460,1090) 1460,1225 1545,1310 v1(1620,1310)
NetPWR1_A: PWR1.A R14.1 | length 95
  Top Layer w7.87: PWR1.A R14.1
PVDD: C3.2 C11.2 IC1.16 L2.2 | length 863.7
  Top Layer w7.87: v1(715,1300) 717.5,1302.5 L2.2 ; v1(1025,940) 1025,1000 1036.1,1011.1 IC1.16
  Bottom Layer w7.87: v1(715,1300) 775,1300 835,1240 835,1000 865,970 980,970 990,960 C11.2 ; C3.2 C11.2 ; v1(1025,940) 995,940 C11.2
PWRDWN: IC1.32 IC4.4 R17.1 | length 501.3
  Top Layer w7.87: IC1.32 1363.9,1148.9 1395,1180 R17.1 1682.6,1177.4 IC4.4
RESET: IC1.28 IC5.4 R19.1 | length 517.5
  Top Layer w7.87: IC1.28 1374.84,1070.16 1445,1000 R19.1 1745.16,1000 IC5.4
RST_IN: C21.2 IC5.2 R18.1 | length 184
  Top Layer w7.87: IC5.2 1885,960 1900,945 C21.2 R18.1
SCL: IC1.31 J1.6 R7.1 | length 1273.9
  Top Layer w7.87: IC1.31 1369.21,1129.21 1390,1150 v1(1410,1150) ; v1(1410,1325) 1430,1325 1440,1335 R7.1
  Bottom Layer w7.87: J1.6 1240.94,1900.94 1085,1745 1085,1535 1295,1325 v1(1410,1325) v1(1410,1150)
SDA: IC1.30 J1.3 R6.1 | length 1348.6
  Top Layer w7.87: v1(1070,1855) 1090,1855 1120.47,1885.47 J1.3 ; IC1.30 1374.53,1109.53 1390,1125 v1(1435,1125) ; v1(1365,1235) v1(1435,1235) 1435,1285 R6.1
  Bottom Layer w7.87: v1(1070,1855) 1069.21,1854.21 1069.21,1530.79 v1(1365,1235) ; v1(1435,1125) v1(1435,1235)
XTAL_N: C22.2 IC1.15 R16.1 Y1.3 | length 565.8
  Top Layer w7.87: C22.2 604.33,925.67 Y1.3 604.33,1024.33 620,1040 810,1040 820,1030 R16.1 845.79,1030.79 IC1.15
XTAL_P: C23.2 IC1.14 R16.2 Y1.1 | length 388.9
  Top Layer w7.87: C23.2 Y1.1 R16.2 875,1085 909.53,1050.47 IC1.14
pads on no net: IC1.5 IC1.6 IC1.24 IC1.25 IC1.26 IC1.27 IC4.1 IC5.1 J1.s1 J1.s2 J1.x1 J1.x2 Y1.4

## Polygon pours and split planes (outlines as drawn)
GND on Bottom Layer "Bottom poly" (solid, pour order 28): 0,0 2362.21,0 2362.21,2362.21 0,2362.21
GND on Top Layer "Bottom poly" (solid, pour order 30): 0,2365 2362.21,2365 2362.21,0 0,0
no net on Top Solder "AntmicroLogo" (solid, pour order 10): 165.55,1282.05 165.55,1293.77 93.75,1293.77 93.75,1282.05
no net on Top Solder "AntmicroLogo" (solid, pour order 12): 151.05,1308.92 144.69,1306.59 137.5,1305.16 129.58,1304.68 121.68,1305.17 114.5,1306.61 108.16,1308.96 102.76,1312.16 98.38,1316.16 95.13,1320.93 93.11,1326.4 92.42,1332.53 93.65,1341.64 97.07,1348.65 104.01,1345.85 102.55,1343.5 101.41,1340.74 100.66,1337.7 100.4,1334.52 102.6,1326.9 108.67,1321.3 117.84,1317.86 129.33,1316.68 140.72,1317.87 149.94,1321.35 156.12,1326.95 158.37,1334.52 158.12,1337.68 157.43,1340.67 156.35,1343.38 154.91,1345.71 162.23,1348.65 165.66,1341.64 166.9,1332.53 166.19,1326.36 164.16,1320.87 160.88,1316.1 156.48,1312.11
no net on Top Solder "AntmicroLogo" (solid, pour order 14): 165.55,1359.96 97.47,1359.96 93.8,1370.67 92.42,1384.47 92.56,1388.36 92.81,1390.74 101.61,1388.07 100.7,1384.61 100.4,1380.75 100.84,1375.97 102.27,1371.69 165.55,1371.69
no net on Top Solder "AntmicroLogo" (solid, pour order 2): 154.58,1005.38 145.17,1003.53 139.16,1004.31 134.08,1006.55 129.85,1010.15 126.4,1014.95 123.65,1020.84 121.55,1027.7 119.99,1035.38 118.93,1043.76 114.53,1043.76 111.08,1043.51 108.14,1042.77 105.68,1041.55 103.7,1039.85 102.18,1037.68 101.12,1035.05 100.49,1031.97 100.28,1028.44 101.55,1018.95 104.81,1010.45 97.62,1007.66 93.87,1017.93 92.42,1029.51 93.81,1040.02 98.08,1047.95 105.34,1052.95 115.73,1054.7 161.83,1054.7 165.51,1044.22 166.9,1030.84 165.5,1019.32 161.38,1010.74
no net on Top Solder "AntmicroLogo" (solid, pour order 4): 165.55,1082.17 102.27,1082.17 100.47,1088.05 99.87,1094.83 100.87,1102.3 103.88,1107.29 108.92,1110.09 115.99,1110.96 165.55,1110.96 165.55,1122.68 115.99,1122.68 105.9,1121.05 98.51,1116 93.96,1107.33 92.42,1094.83 93.8,1081.79 97.47,1070.45 165.55,1070.45
no net on Top Solder "AntmicroLogo" (solid, pour order 6): 161.61,1143.56 155.94,1140.05 148.11,1138.81 101.07,1138.81 101.07,1130.55 93.75,1130.55 93.75,1138.81 77.23,1138.81 73.63,1150.53 93.75,1150.53 93.75,1163.06 101.07,1163.06 101.07,1150.53 148.11,1150.53 152.3,1151.1 155.44,1152.8 157.41,1155.59 158.1,1159.46 157.56,1163.06 165.03,1163.06 165.93,1159.88 166.23,1155.99 165.06,1148.98
no net on Top Solder "AntmicroLogo" (solid, pour order 8): 165.66,1185.57 ccw(c165.55,1185.57) 165.55,1185.68 102.35,1185.68 100.53,1191.76 99.98,1199.03 100.22,1202.72 100.95,1205.85 102.13,1208.45 103.71,1210.53 105.68,1212.12 108.01,1213.23 110.66,1213.88 113.61,1214.1 113.6,1214.1 165.55,1214.1 ccw(c165.55,1214.21) 165.66,1214.21 165.66,1225.8 ccw(c165.55,1225.8) 165.55,1225.91 106.72,1225.91 103.94,1228.69 101.82,1231.94 100.45,1235.64 99.98,1239.79 100.25,1243.43 101.07,1246.5 102.4,1249.03 104.19,1251.05 106.42,1252.58 109.07,1253.64 112.1,1254.27 115.47,1254.47 165.55,1254.47 ccw(c165.55,1254.58) 165.66,1254.58 165.66,1266.17 ccw(c165.55,1266.17) 165.55,1266.28 115.6,1266.28 ccw(c115.6,1266.17) 115.59,1266.28 106.17,1264.79 ccw(c106.19,1264.69) 106.13,1264.78 ccw(c106.19,1264.69) 106.13,1264.78 98.81,1260.2 ccw(c98.86,1260.11) 98.8,1260.2 ccw(c98.86,1260.11) 98.77,1260.17 ccw(c98.86,1260.11) 98.77,1260.17 94.02,1252.29 cw(c94.11,1252.24) 94.02,1252.29 ccw(c94.11,1252.24) 94,1252.25 92.31,1240.88 ccw(c92.42,1240.86) 92.31,1240.85 ccw(c92.42,1240.86) 92.31,1240.85 92.89,1234.7 92.89,1234.69 cw(c93,1234.71) 92.89,1234.7 ccw(c93,1234.71) 92.89,1234.67 94.56,1229.1 ccw(c94.66,1229.13) 94.57,1229.08 97.21,1224.2 ccw(c97.3,1224.25) 97.22,1224.18 ccw(c97.3,1224.25) 97.22,1224.18 100.66,1220.21 97.11,1216.45 cw(c97.19,1216.38) 97.11,1216.45 ccw(c97.19,1216.38) 97.1,1216.43 ccw(c97.19,1216.38) 97.1,1216.43 cw(c97.19,1216.38) 97.11,1216.45 97.1,1216.43 94.47,1211.76 ccw(c94.57,1211.71) 94.47,1211.76 ccw(c94.57,1211.71) 94.46,1211.74 92.86,1205.92 ccw(c92.96,1205.89) 92.85,1205.9 ccw(c92.96,1205.89) 92.85,1205.9 92.31,1198.63 cw(c92.42,1198.62) 92.31,1198.63 ccw(c92.42,1198.62) 92.31,1198.61 93.69,1185.24 ccw(c93.8,1185.25) 93.7,1185.22 97.37,1173.94 ccw(c97.47,1173.97) 97.47,1173.86 165.55,1173.86 ccw(c165.55,1173.97) 165.66,1173.97 165.66,1185.57 cw(c1433.11,743.83)
no net on Top Solder "AntmicroLogo" (solid, pour order 16): 150.88,1396.26 156.33,1399.3 160.78,1403.26 164.1,1408.15 166.18,1413.98 166.9,1420.79 166.18,1427.59 164.1,1433.43 160.78,1438.32 156.33,1442.28 150.88,1445.32 144.52,1447.47 137.38,1448.75 129.58,1449.17 121.83,1448.75 114.73,1447.47 108.4,1445.32 102.96,1442.28 98.52,1438.32 95.21,1433.43 93.14,1427.59 92.42,1420.79 93.14,1413.98 95.21,1408.15 98.52,1403.26 102.96,1399.3 108.4,1396.26 114.73,1394.11 121.83,1392.83 129.58,1392.41 137.38,1392.83 144.52,1394.11
no net on Top Solder "AntmicroLogo" (solid, pour order 18): 205 vertices, not listed, extent 86.86,419.91 1426.38,923.88
no net on Top Solder "AntmicroLogo" (solid, pour order 34): 319 vertices, not listed, extent 26.02,801.03 232.13,980.97

## Other copper
Top Layer:
  rectangle net GND: 61,816 201,971
  rectangle net GND: 72,1008 186,1063
  rectangle net GND: 74,1380 214,1470

## Silkscreen, mask and mechanical layers (free items; w line width, h text height)
Top Overlay:
  lines w10: 75,20 75,100 ; 75,340 75,420 ; 510,20 510,100 ; 510,340 510,420 ; 656.67,20 656.67,100 ; 656.67,340 656.67,420 ; 1091.67,20 1091.67,100 ; 1091.67,340 1091.67,420 ; 1233.33,20 1233.33,100 ; 1238.33,340 1238.33,420 ; 1673.33,20 1673.33,100 ; 1673.33,340 1673.33,420 ; 1810,20 1810,100 ; 1820,340 1820,420 ; 2255,20 2255,100 ; 2255,340 2255,420
  text "PRIMARY" at 1335,1650 h30
  text "I2C ADDRESS" at 1845,1482.2 h30
  text "OPEN -> 0x40h" at 1845,1407.2 h30
  text "CLOSED -> 0x42h" at 1845,1347.2 h30
Top Solder:
  pour cut-out: 145.74,1406.1 140.71,1404.97 135.19,1404.33 129.32,1404.13 123.46,1404.33 117.98,1404.97 112.97,1406.1 108.6,1407.76 104.97,1410.02 102.22,1412.9 100.48,1416.48 99.87,1420.79 100.48,1425.1 102.22,1428.68 104.97,1431.57 108.6,1433.82 112.97,1435.48 117.98,1436.6 123.46,1437.24 129.32,1437.45 135.19,1437.24 140.71,1436.6 145.74,1435.48 150.17,1433.82 153.84,1431.57 156.63,1428.68 158.41,1425.1 159.03,1420.79 158.41,1416.48 156.63,1412.9 153.84,1410.02 150.17,1407.76
  pour cut-out: 151.38,1015.83 144.91,1014.72 136.77,1016.69 131.03,1022.4 127.27,1031.52 125.05,1043.76 157.69,1043.76 158.68,1041.37 159.44,1038.48 159.92,1035.28 160.09,1031.91 159.09,1024.5 156.15,1019.12
  pour cut-out: 108.07,867.58 cw(c105.22,867.58) 105.22,864.73 cw(c105.22,867.58) 102.38,867.58 cw(c105.22,867.58) 105.22,870.43 cw(c105.22,867.58) 108.07,867.58 ccw(c1372.78,425.84)
  pour cut-out: 131.92,864.03 cw(c129.07,864.03) 129.07,861.18 cw(c129.07,864.03) 126.22,864.03 cw(c129.07,864.03) 129.07,866.88 cw(c129.07,864.03) 131.92,864.03 ccw(c1396.62,422.29)
  pour cut-out: 168.56,890.99 cw(c162.98,890.99) 162.98,885.41 cw(c162.98,890.99) 157.4,890.99 cw(c162.98,890.99) 162.98,896.57 cw(c162.98,890.99) 168.56,890.99 ccw(c1430.54,449.26)
  pour cut-out: 131.92,917.95 cw(c129.07,917.95) 129.07,915.09 cw(c129.07,917.95) 126.22,917.95 cw(c129.07,917.95) 129.07,920.8 cw(c129.07,917.95) 131.92,917.95 ccw(c1396.62,476.21)
  pour cut-out: 108.07,914.4 cw(c105.22,914.4) 105.22,911.56 cw(c105.22,914.4) 102.38,914.4 cw(c105.22,914.4) 105.22,917.25 cw(c105.22,914.4) 108.07,914.4 ccw(c1372.78,472.67)
  pour cut-out: 155.77,867.58 cw(c152.92,867.58) 152.92,864.73 cw(c152.92,867.58) 150.07,867.58 cw(c152.92,867.58) 152.92,870.43 cw(c152.92,867.58) 155.77,867.58 ccw(c1420.47,425.84)
  pour cut-out: 100.74,890.99 cw(c95.16,890.99) 95.16,885.41 cw(c95.16,890.99) 89.58,890.99 cw(c95.16,890.99) 95.16,896.57 cw(c95.16,890.99) 100.74,890.99 ccw(c1362.72,449.26)
  pour cut-out: 152.92,911.56 ccw(c152.92,914.4) 155.77,914.4 ccw(c152.92,914.4) 152.92,917.25 ccw(c152.92,914.4) 150.07,914.4 ccw(c152.92,914.4) 152.92,911.56 ccw(c1420.47,472.67)
  text "ModADV7280-M" at 280.79,990.39 h80 r90
  text "Rev.2.0    06/2015" at 350,990.35 h60 r90
Mechanical 1:
  the board outline again, w10